# Altium PCB altium_LCD-v2.pcbdoc
Units mm, origin at the board's own origin, x right, y up, seen from the top; angles counter-clockwise.
Board outline 110.65 x 95.65 mm, 2 copper layers (Top Layer, Bottom Layer); 13 components, 1 nets, 74 pads, 2 vias.
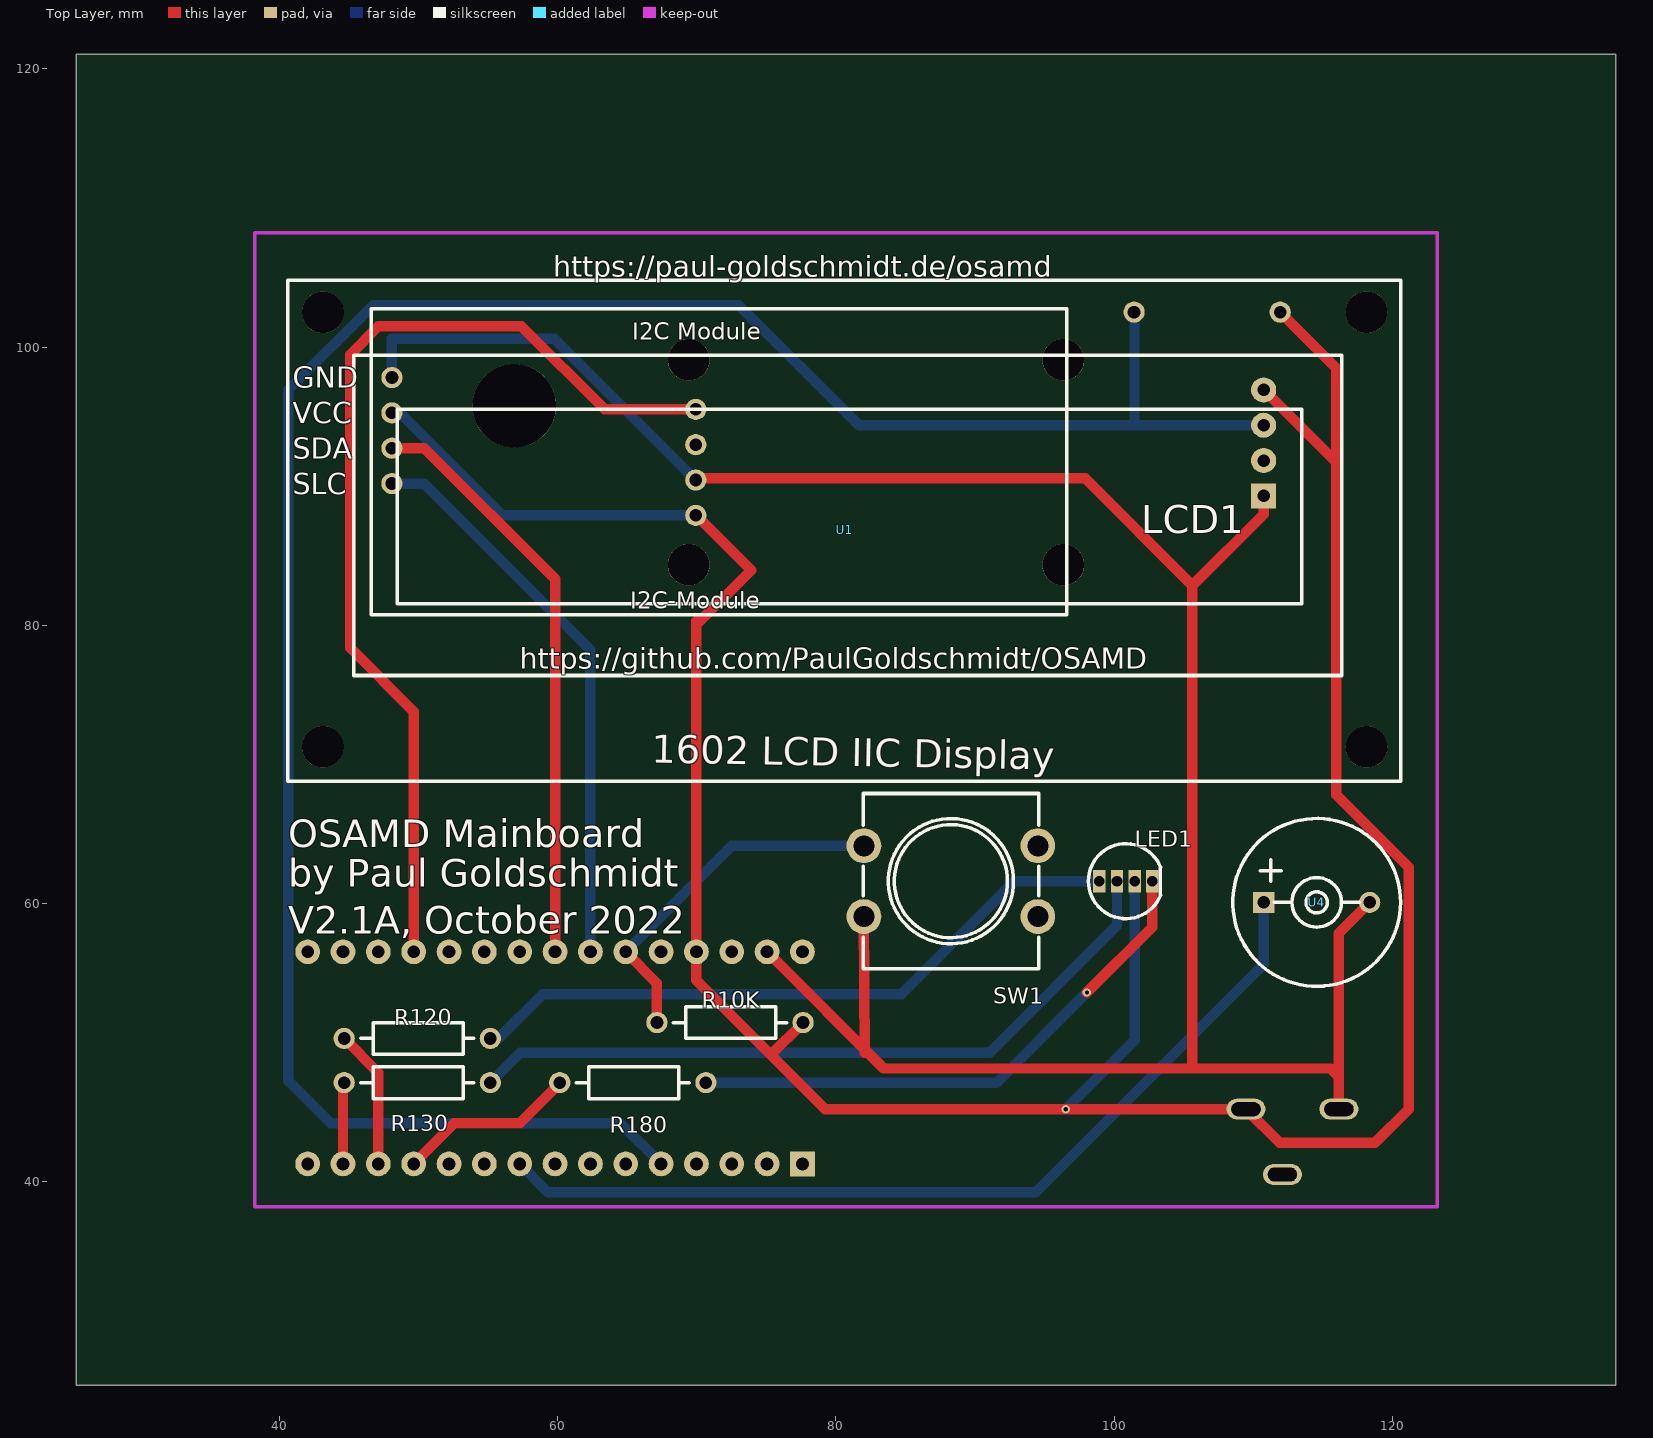
[diagram p0: Top Layer view]
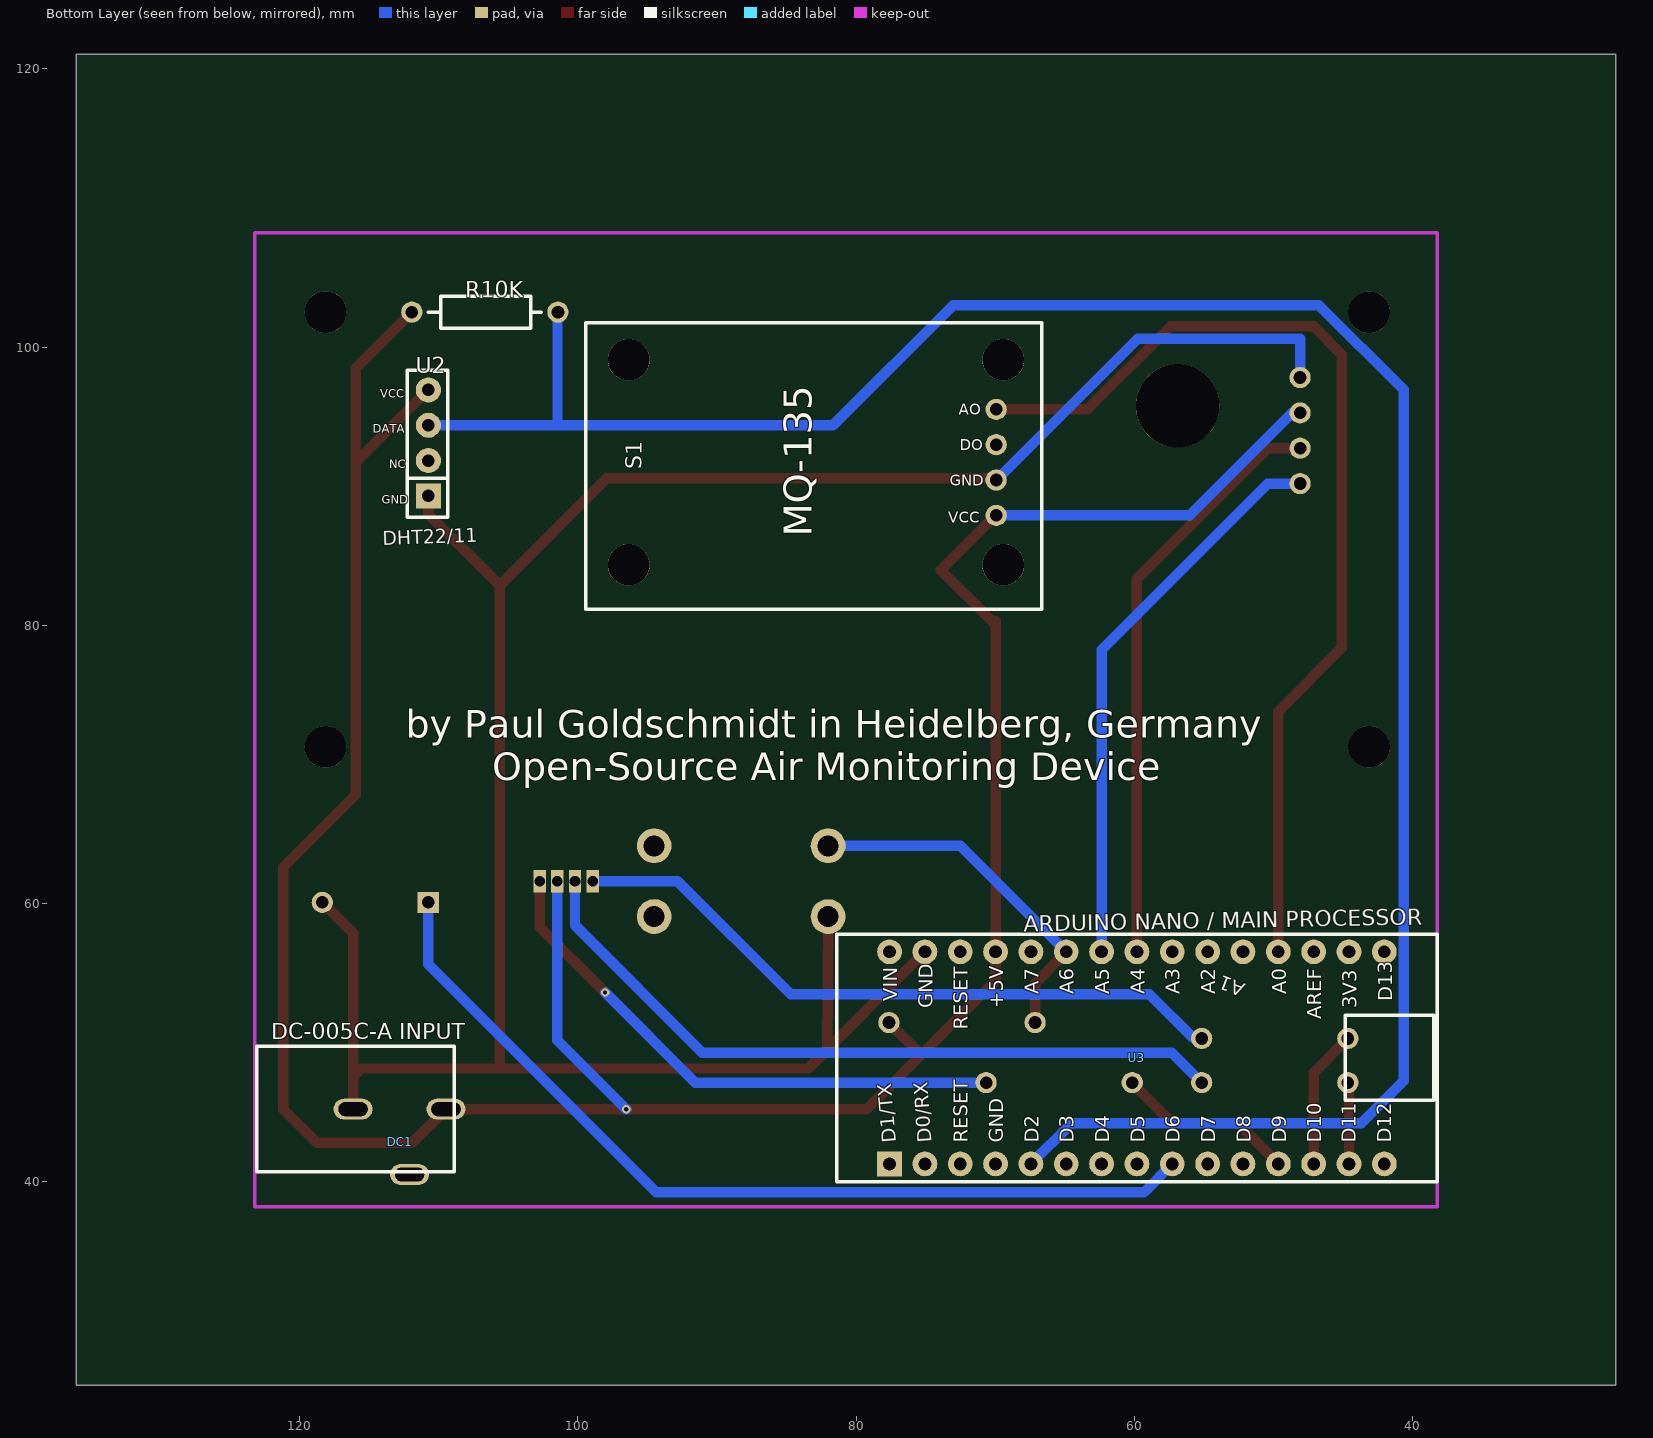
[diagram p1: Bottom Layer view, seen from below]

## Layer stack, top to bottom
Top Layer: signal copper (thickness not stored)
Dielectric: dielectric 0.32, FR-4, Dk 4.8
Bottom Layer: signal copper (thickness not stored)

## Board outline
136.054,25.4 25.4,25.4 25.4,121.054 136.054,121.054

## Components (designator, comment, footprint, x,y, rotation, side; value= is the part's Value field where it differs from the comment)
DC1 "DC-005C-A INPUT" DC-005C-A 112.776,42.822 r0 bottom
LED1 "LED-RGB-THRU" LED-RGB-THRU 100.838,61.618 r0 top
R10K "RES-TH_BD2.2-L6.5-P10.50-D0.6" RES-TH_BD2.2-L6.5-P10.50-D0.6#1 106.68,102.512 r0 bottom
R10K "RES-TH_BD2.2-L6.5-P10.50-D0.6" RES-TH_BD2.2-L6.5-P10.50-D0.6#2 72.39,51.458 r0 top
R120 "RES-TH_BD2.2-L6.5-P10.50-D0.6" RES-TH_BD2.2-L6.5-P10.50-D0.6#2 49.911,50.315 r0 top
R130 "RES-TH_BD2.2-L6.5-P10.50-D0.6" RES-TH_BD2.2-L6.5-P10.50-D0.6#2 49.911,47.14 r0 top
R180 "RES-TH_BD2.2-L6.5-P10.50-D0.6" RES-TH_BD2.2-L6.5-P10.50-D0.6#2 65.405,47.14 r0 top
S1 "MQ-135" MQ-135 69.424,84.351 r270 bottom
SW1 "SW-TH_4P-L12.0-W12.0-P5.00-LS12.5" SW-TH_4P-L12.0-W12.0-P5.00-LS12.5 88.265,61.618 r0 top
U1 "1602 LCD IIC" "1602 LCD IIC" 40.595,104.798 r0 top
U2 "DHT11 / DHT22" "DHT11 / DHT22" 110.744,91.844 r0 bottom
U3 "ARDUINO_NANO_V3" ARDUINO_NANO_V3 59.817,48.918 r270 bottom
U4 "BUZZER-12MM" BUZZER-12MM 108.458,60.094 r0 top

## Footprints (in the part's own frame and the unit in brackets; to place one, negate y for a bottom-side part, rotate by r counter-clockwise, add the part's x,y. Pads: shape width x height; smd on the part's side, far side on the other; paste and mask are expansions set on the pad)
"1602 LCD IIC" [mil]
  round 60 hole 36: 1(295.28,-275) 2(295,-375) 3(295,-475) 4(295,-575)
  round 118.11 hole 118.11 unplated: ""(100,-1320) ""(100,-90) ""(3052.76,-1320) ""(3052.76,-90)
  silkscreen extent 0,-1417 3150,0
ARDUINO_NANO_V3 [mil]
  rect 70x70 hole 36: 1(300,-700)
  round 70 hole 36: 2(300,-600) 3(300,-500) 4(300,-400) 5(300,-300) 6(300,-200) 7(300,-100) 8(300,0) 9(300,100) 10(300,200) 11(300,300) 12(300,400) 13(300,500) 14(300,600) 15(300,700) 16(-300,700) 17(-300,600) 18(-300,500) 19(-300,400) 20(-300,300) 21(-300,200) 22(-300,100) 23(-300,0) 24(-300,-100) 25(-300,-200) 26(-300,-300) 27(-300,-400) 28(-300,-500) 29(-300,-600) 30(-300,-700)
  silkscreen extent -350,-850 350,850
BUZZER-12MM [mil]
  rect 60x60 hole 36: 1(90,0)
  round 60 hole 36: 2(390,0)
  silkscreen extent 3,-237 478,237
DC-005C-A [mm]
  oval 2.799x1.5 hole 1 slot 2.1 at 0 deg: 1(-3.303,-2.413) 2(3.377,-2.413) 3(-0.687,2.286)
  silkscreen extent -3.89,-6.93 10.31,2.08
"DHT11 / DHT22" [mm]
  round 1.8 hole 0.9: 1(0,-5.08) 2(0,-2.54) 3(0,0)
  rect 1.8x1.8 hole 0.9: 4(0,2.54)
  silkscreen extent -1.4,-6.48 1.52,4.06
LED-RGB-THRU [mil]
  rect 35x63 hole 30: 1(75,0) 2(25,0) 3(-25,0) 4(-75,0)
  silkscreen extent -106,-106 98,106
MQ-135 [mil]
  round 60 hole 36: 1(-440,-20) 2(-340,-20) 3(-240,-20) 4(-140,-20)
  round 118.11 hole 118.11 unplated: ""(-580,-1060) ""(-580,0) ""(0,-1060) ""(0,0)
RES-TH_BD2.2-L6.5-P10.50-D0.6#1 [mil]
  round 60 hole 36: 1(206.69,0) 2(-206.69,0)
  silkscreen extent -160,-45 160,45
RES-TH_BD2.2-L6.5-P10.50-D0.6#2 [mil]
  round 60 hole 36: 1(-206.69,0) 2(206.69,0)
  silkscreen extent -160,-45 160,45
SW-TH_4P-L12.0-W12.0-P5.00-LS12.5 [mm]
  round 2.5 hole 1.5: 1(-6.25,2.54) 2(6.25,2.54) 3(-6.25,-2.54) 4(6.25,-2.54)
  silkscreen extent -6.3,-6.3 6.3,6.3

## Free pads (board coordinates)
  round 6 hole 6 unplated: ""(56.896,95.781)

## Via types
v1: diameter 0.61, hole 0.305, Top Layer to Bottom Layer, tented both sides, 2 vias

## Nets (pads, with @x,y where several pads share a name; then routed paths per layer and width w, separated by ;. In a path a pad name is that pad's centre, name@x,y a point inside that pad or via, vN(x,y) a via of type N, cw(c..) or ccw(c..) an arc to the next point about the centre after c; other vN are vias at no path point)
S$536: DC1.1 DC1.2 LED1.1 LED1.2 LED1.3 LED1.4 R10K.1 R10K.2 R120.1 R120.2 R130.1 R130.2 R180.1 R180.2 S1.1 S1.3 S1.4 SW1.1 SW1.2 SW1.3 SW1.4 U1.1 U1.2 U1.3 U1.4 U2.1 U2.2 U2.4 U3.4 U3.5 U3.8 U3.9 U3.12 U3.13 U3.14 U3.19 U3.22 U3.23 U3.24 U3.25 U3.27 U3.29 U4.1 U4.2 | length 972
  Top Layer w0.75: U3.14 44.577,47.056 R130.1 ; R120.1 47.117,47.859 U3.13 ; U1.3 50.419,92.733 59.817,83.335 U3.23 ; U3.12 52.578,44.219 57.277,44.219 60.155,47.097 R180.1 ; U3.19 49.657,73.81 45.085,78.382 45.085,99.464 47.117,101.496 57.404,101.496 63.373,95.527 S1.1 ; U3.25 67.14,54.295 R10K.1@67.14,51.458 ; S1.4 69.977,87.907 73.914,83.97 70.231,80.287 69.977,80.287 U3.27 69.977,54.506 79.248,45.235 DC1.1 111.887,42.822 118.745,42.822 121.158,45.235 121.158,62.634 115.951,67.841 115.951,91.717 ; S1.3 70.059,90.574 97.917,90.574 105.623,82.868 ; U3.29 83.439,48.156 115.57,48.156 116.154,47.572 ; 75.331,49.152 R10K.2@77.64,51.458 ; SW1.3 82.067,49.299 ; v1(98.044,53.617) 102.743,58.316 LED1.1 ; 105.623,48.156 105.623,82.868 ; U2.4 110.744,87.989 105.623,82.868 ; U2.1 115.951,91.717 ; R10K.1@111.93,102.512 115.951,98.491 115.951,91.717 ; DC1.2 116.154,47.572 ; U4.2 116.154,57.884 116.154,47.572
  Bottom Layer w0.75: U1.4 50.419,90.193 62.357,78.255 U3.24 ; U1.2 48.641,95.273 56.007,87.907 S1.4 ; U1.1 48.095,100.607 59.771,100.607 S1.3 ; R130.2 57.32,49.299 91.059,49.299 100.203,58.443 LED1.3 ; R120.2 55.753,50.315 58.928,53.49 84.709,53.49 92.837,61.618 LED1.4 ; U3.9 59.309,39.266 94.361,39.266 110.744,55.649 U4.1 ; U3.25 72.517,64.158 SW1.1 ; U3.5 64.516,44.219 43.688,44.219 40.64,47.267 40.64,96.924 46.736,103.02 73.025,103.02 81.661,94.384 U2.2 ; R180.2 91.567,47.14 v1(98.044,53.617) ; v1(96.52,45.235) 101.473,50.188 LED1.2 ; R10K.2@101.43,102.512 101.46,102.482 101.46,94.384
pads on no net: DC1.3 S1. S1.2 U1. U2.3 U3.1 U3.2 U3.3 U3.6 U3.7 U3.10 U3.11 U3.15 U3.16 U3.17 U3.18 U3.20 U3.21 U3.26 U3.28 U3.30

## Silkscreen, mask and mechanical layers (free items; w line width, h text height)
Top Overlay:
  text "https://paul-goldschmidt.de/osamd" at 59.69,105.064 h1.5
  text "https://github.com/PaulGoldschmidt/OSAMD" at 57.277,76.87 h1.5
  text "OSAMD Mainboard" at 40.64,64.047 h2
  text "by Paul Goldschmidt" at 40.64,61.209 h2
  text "V2.1A, October 2022" at 40.64,57.824 h2
Bottom Overlay:
  lines w0.254: 66.675,81.176 99.441,81.176 99.441,101.75 66.675,101.75 66.675,81.176
  text "by Paul Goldschmidt in Heidelberg, Germany" at 112.35,71.921 h2
  text "Open-Source Air Monitoring Device" at 106.168,68.873 h2
  text "ARDUINO NANO / MAIN PROCESSOR" at 67.935,57.999 h1.14 r359
Document:
  lines w0.003: 80.727,73.227 80.727,73.227

## Text inside footprints (layer, text, board x,y; h text height)
S1: Bottom Overlay "GND" at 73.279,90.047 h0.8; Bottom Overlay "DO" at 72.565,92.587 h0.8; Bottom Overlay "AO" at 72.639,95.127 h0.8; Bottom Overlay "VCC" at 73.388,87.38 h0.8
U1: Top Overlay "I2C Module" at 65.361,100.515 h1.2; Top Overlay "SLC" at 40.977,89.443 h1.5; Top Overlay "SDA" at 40.977,91.983 h1.5; Top Overlay "VCC" at 40.977,94.523 h1.5; Top Overlay "GND" at 40.977,97.063 h1.5; Top Overlay "1602 LCD IIC Display" at 66.74,70.127 h2.03 r359; Top Overlay "I2C-Module" at 65.234,81.211 h1.2; Top Overlay "LCD1" at 101.937,86.637 h2.03
U2: Bottom Overlay "DHT22/11" at 114.029,85.756 h1 r358; Bottom Overlay "GND" at 114.1,88.75 h0.6; Bottom Overlay "VCC" at 114.183,96.37 h0.6; Bottom Overlay "DATA" at 114.745,93.83 h0.6; Bottom Overlay "NC" at 113.538,91.29 h0.6
U3: Bottom Overlay "D1/TX" at 77.114,42.867 h1.02 r265; Bottom Overlay "GND" at 74.503,52.474 h1.02 r270; Bottom Overlay "+5V" at 69.423,52.474 h1.02 r270; Bottom Overlay "D12" at 41.552,42.822 h1.02 r270; Bottom Overlay "VIN" at 77.043,52.982 h1.02 r270; Bottom Overlay "D13" at 41.483,52.982 h1.02 r270; Bottom Overlay "GND" at 69.423,42.822 h1.02 r270; Bottom Overlay "D0/RX" at 74.573,42.857 h1.02 r266; Bottom Overlay "RESET" at 71.963,42.822 h1.02 r270; Bottom Overlay "D2" at 66.883,42.822 h1.02 r270; Bottom Overlay "D3" at 64.343,42.822 h1.02 r270; Bottom Overlay "D4" at 61.803,42.822 h1.02 r270; Bottom Overlay "D5" at 59.263,42.822 h1.02 r270; Bottom Overlay "D6" at 56.723,42.822 h1.02 r270; Bottom Overlay "D7" at 54.183,42.822 h1.02 r270; Bottom Overlay "D8" at 51.643,42.822 h1.02 r270; Bottom Overlay "D9" at 49.103,42.822 h1.02 r270; Bottom Overlay "D10" at 46.563,42.822 h1.02 r270; Bottom Overlay "D11" at 44.092,42.822 h1.02 r270; Bottom Overlay "3V3" at 44.023,52.474 h1.02 r270; Bottom Overlay "AREF" at 46.563,51.712 h1.02 r270; Bottom Overlay "A0" at 49.103,53.49 h1.02 r270; Bottom Overlay "A1" at 51.969,54.218 h1.02 r201; Bottom Overlay "A2" at 54.183,53.49 h1.02 r270; Bottom Overlay "A3" at 56.723,53.49 h1.02 r270; Bottom Overlay "A4" at 59.263,53.49 h1.02 r270; Bottom Overlay "A5" at 61.803,53.49 h1.02 r270; Bottom Overlay "A6" at 64.343,53.49 h1.02 r270; Bottom Overlay "A7" at 66.883,53.49 h1.02 r270; Bottom Overlay "RESET" at 71.963,50.95 h1.02 r270